# Altium PCB PCB1.PcbDoc
Units mm, origin at the board's own origin, x right, y up, seen from the top; angles counter-clockwise.
Board outline 152.4 x 101.6 mm, 2 copper layers (Top Layer, Bottom Layer); 36 components, 22 nets, 142 pads, 32 vias.
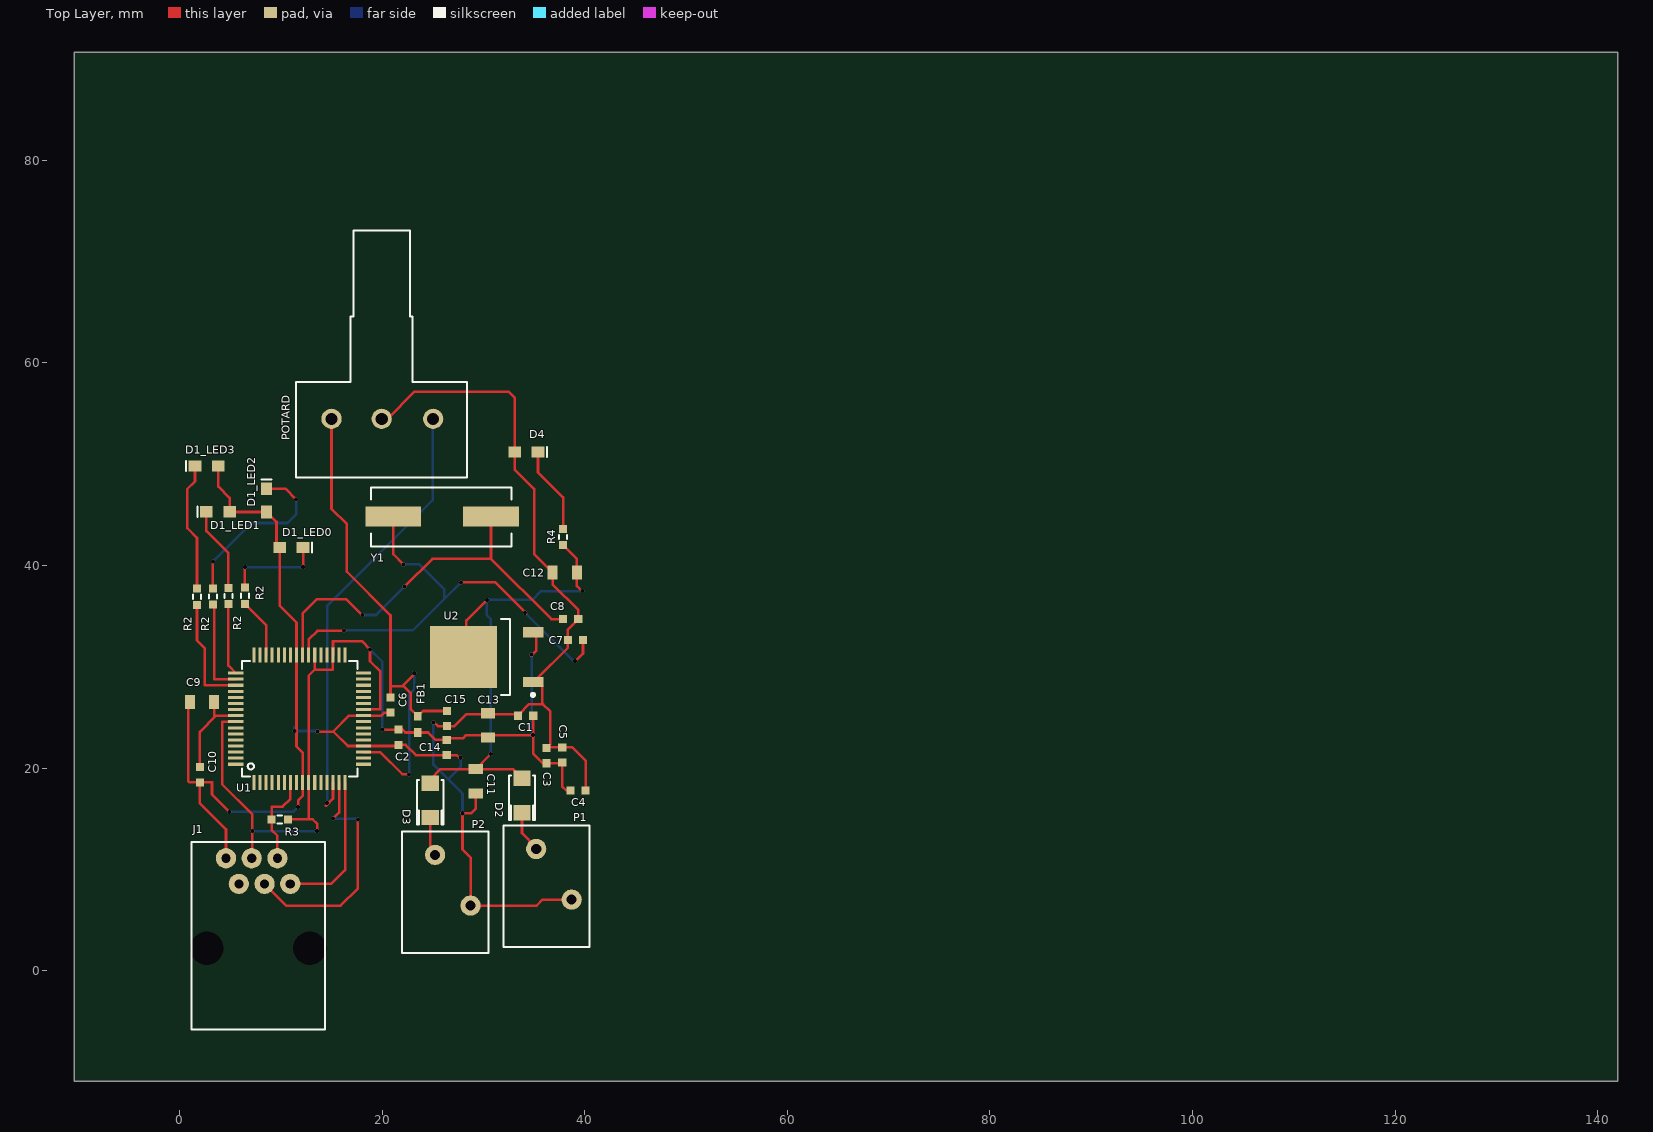
[diagram p0: Top Layer view]
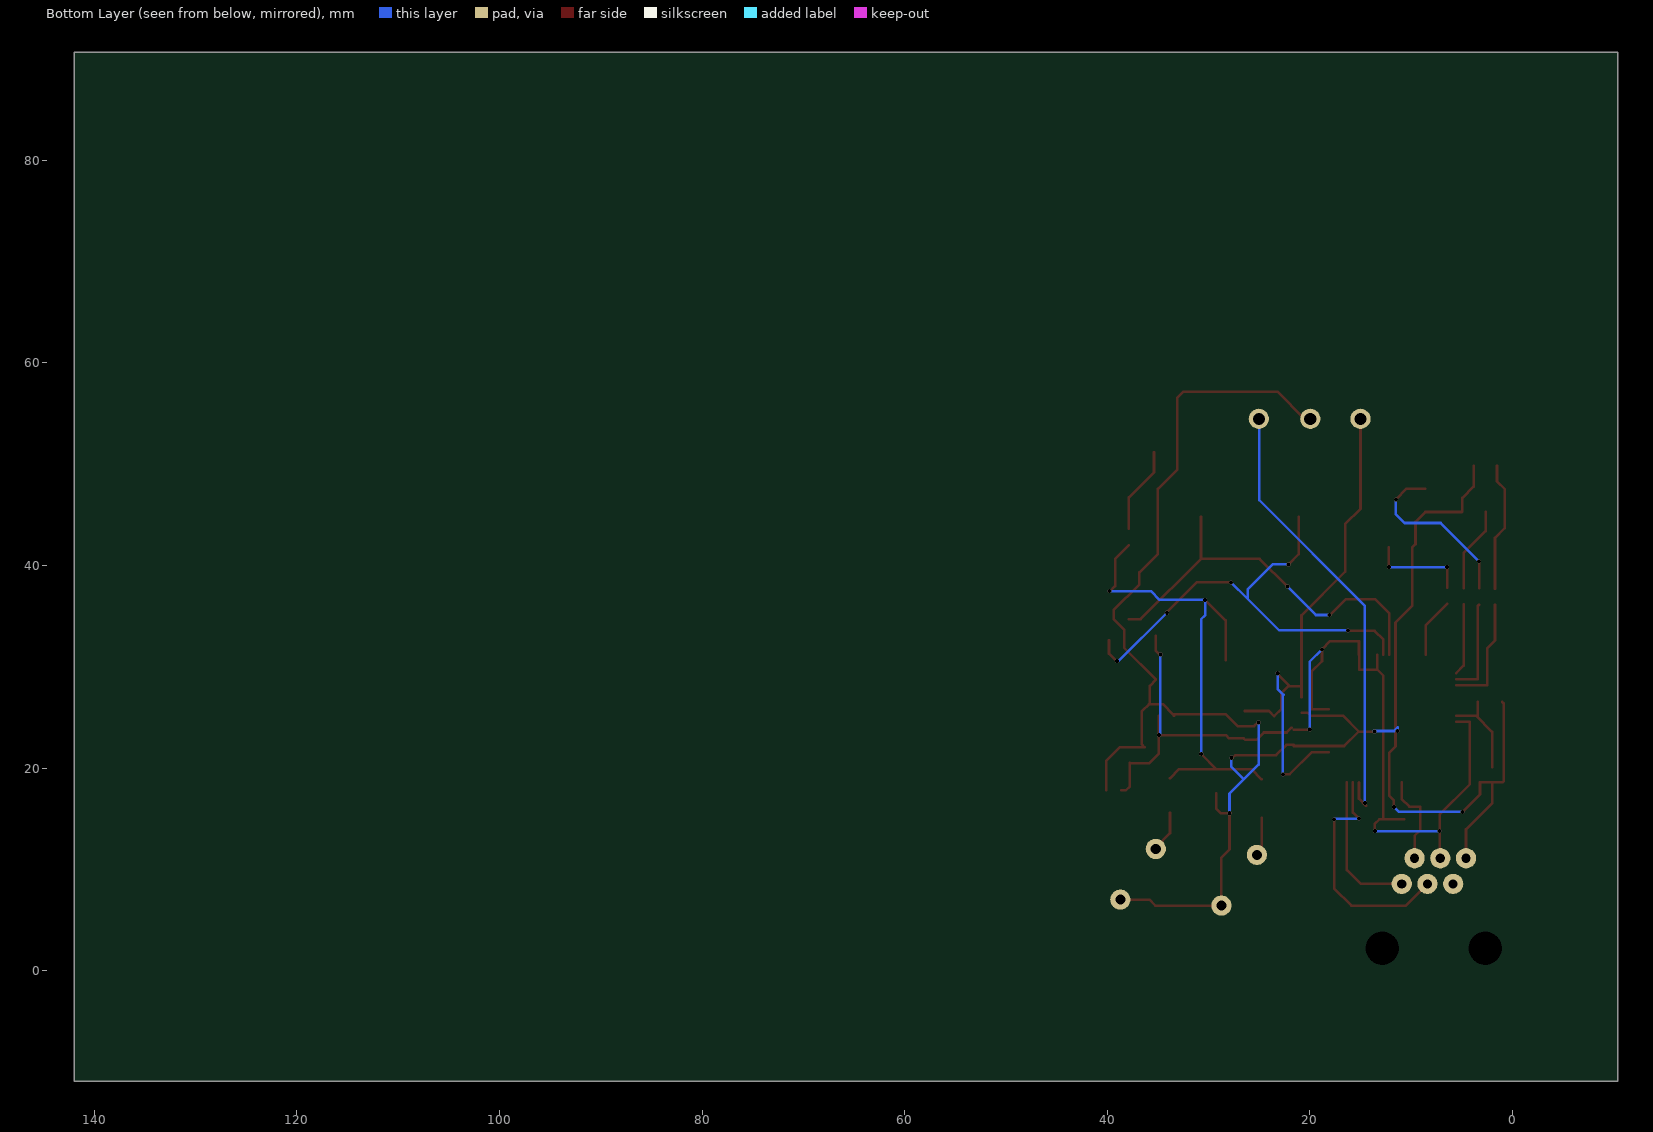
[diagram p1: Bottom Layer view, seen from below]

## Layer stack, top to bottom
Top Solder: solder mask 0.0102, Solder Resist, Dk 3.5
Top Layer: signal copper 0.0356
Dielectric 1: dielectric 0.32, FR-4, Dk 4.8
Bottom Layer: signal copper 0.0356
Bottom Solder: solder mask 0.0102, Solder Resist, Dk 3.5

## Board outline
-10.414,-10.922 141.986,-10.922 141.986,90.678 -10.414,90.678

## Design rules (kind name [scope] priority, off if disabled: settings)
Clearance [All] p1: gap=0.254
PolygonConnect [All] p1: connectstyle=Relief reliefconductorwidth=0.254 reliefentries=4 polygonreliefangle="90 Angle" airgapwidth=0.254
RoutingVias [All] p1: holewidth=0.711 width=1.27 viastyle="Through Hole" minholewidth=0.711 minwidth=1.27 maxholewidth=0.711 maxwidth=1.27
SolderMaskExpansion [All] p1: expansion=0.102
UnpouredPolygon [All] p1: allowunpoured=FALSE
Width [All] p1: maxlimit=0.254 minlimit=0.254 preferedwidth=0.254
29 further rules are at their usual default settings.

## Classes and differential pairs
channel class P4: LED0 LED1 LED2 LED3
net class LED[0..3]: LED0 LED1 LED2 LED3
component class POWER: C11 C12 C13 C14 C15 D2 D3 D4 FB1 R4 U2
component class PIC: C1 C2 C3 C4 C5 C6 C7 C8 C9 C10 J1 R3 U1 Y1
component class P1: POTARD
component class LED3: D1_LED3 R2
component class LED2: D1_LED2 R2
component class LED1: D1_LED1 R2
component class LED0: D1_LED0 R2

## Components (designator, comment, footprint, x,y, rotation, side; value= is the part's Value field where it differs from the comment)
C1 "100n" CAPC1608N 32.565,24.961 r0 top
C2 "100n" CAPC1608N 21.795,21.459 r90 top
C3 "100n" CAPC1608N 36.019,22.817 r270 top
C4 "100n" CAPC1608N 40.919,18.002 r180 top
C5 "100n" CAPC1608N 37.561,22.881 r270 top
C6 "100n" CAPC1608N 21.001,24.631 r90 top
C7 "20p" CAPC1608N 40.654,32.832 r180 top
C8 "20p" CAPC1608N 37.014,34.499 r0 top
C9 "6.3V" CAPC2012N 3.199,27.129 r180 top
C10 "6.3V" CAPC1608N 1.789,20.926 r270 top
C11 "6.3V" CAPC2012N 29.831,17.697 r90 top
C12 "6.3V" CAPC2012N 37.014,38.717 r0 top
C13 "6.3V" CAPC2012N 29.828,25.216 r270 top
C14 "6.3V" CAPC1608N 26.567,20.441 r90 top
C15 "6.3V" CAPC1608N 26.601,23.298 r90 top
D1_LED0 "Green LED" "LED 0805N" 11.026,41.779 r180 top (schematic designator D1)
D1_LED1 "Green LED" "LED 0805N" 3.781,45.316 r0 top (schematic designator D1)
D1_LED2 "Green LED" "LED 0805N" 8.577,46.439 r270 top (schematic designator D1)
D1_LED3 "Green LED" "LED 0805N" 2.658,49.84 r0 top (schematic designator D1)
D2 "GF1A" "GF1A Diode" 33.792,17.288 r90 top
D3 "GF1A" "GF1A Diode" 24.74,16.81 r90 top
D4 "Green LED" "LED 0805N" 34.225,51.201 r180 top
FB1 "Inductor" INDC1608AN 23.503,24.316 r90 top
J1 "Program / Debug" RJ12_90 1.143,12.7 r270 top
P1 "12V Main" PHOENIX_1985195 31.945,2.313 r0 top
P2 "12V Battery" PHOENIX_1985195 21.963,1.726 r0 top
POTARD "RPot" POTARD 19.939,54.483 r0 top (schematic designator R1)
R2 "Res1" RESC1608N 1.706,36.914 r270 top
R2 "Res1" RESC1608N 3.27,36.948 r270 top
R2 "Res1" RESC1608N 4.801,36.982 r270 top
R2 "Res1" RESC1608N 6.434,37.016 r270 top
R3 "Res1" RESC1608N 9.869,14.94 r0 top
R4 "Res1" RESC1608N 37.857,42.819 r270 top
U1 "PIC32MX764F128H-I/PT" QFP50P1200X1200X120-64 6.128,19.179 r90 top
U2 "AP1117" TD03B_N 28.03,30.967 r90 top
Y1 "8MHz" "HC49/4H SMX CRYSTAL" 25.908,44.831 r180 top

## Footprints (in the part's own frame and the unit in brackets; to place one, negate y for a bottom-side part, rotate by r counter-clockwise, add the part's x,y. Pads: shape width x height; smd on the part's side, far side on the other; paste and mask are expansions set on the pad)
CAPC1608N [mm]
  rect 0.8x0.8 smd: 1(0.838,0.203) 2(2.337,0.203)
CAPC2012N [mm]
  rect 1x1.4 smd: 1(-0.2,0.6) 2(2.2,0.6)
"GF1A Diode" [mm]
  rect 1.5x1.7 smd: 1(-1.7,0) 2(1.7,0)
  silkscreen extent -2.4,-1.3 2,1.3
"HC49/4H SMX CRYSTAL" [mm]
  rect 5.5x2 smd: 1(-4.826,0) 2(4.826,0)
  silkscreen extent -6.86,-2.86 7.04,2.94
INDC1608AN [mm]
  rect 0.85x0.7 smd: 1(-0.8,0) 2(0.8,0)
"LED 0805N" [mm]
  rect 1.25x1.1 smd: 1(-1.15,0) 2(1.15,0)
  silkscreen extent -2.05,-0.5 -2.05,0.5
PHOENIX_1985195 [mm]
  round 2 hole 1: 1(3.25,9.7) 2(6.75,4.7)
  silkscreen extent 0,0 8.5,12
POTARD [mm]
  round 2 hole 1.2: 1(-4.953,0) 2(0,0) 3(5.08,0)
  silkscreen extent -8.45,-5.8 8.45,18.62
QFP50P1200X1200X120-64 [mm]
  rect 1.5x0.3 smd mask+0.102: 1(-0.6,-1.2) 2(-0.6,-1.8) 3(-0.6,-2.4) 4(-0.6,-3) 5(-0.6,-3.6) 6(-0.6,-4.2) 7(-0.6,-4.8) 8(-0.6,-5.4) 9(-0.6,-6) 10(-0.6,-6.6) 11(-0.6,-7.2) 12(-0.6,-7.8) 13(-0.6,-8.4) 14(-0.6,-9) 15(-0.6,-9.6) 16(-0.6,-10.2) 33(12,-10.2) 34(12,-9.6) 35(12,-9) 36(12,-8.4) 37(12,-7.8) 38(12,-7.2) 39(12,-6.6) 40(12,-6) 41(12,-5.4) 42(12,-4.8) 43(12,-4.2) 44(12,-3.6) 45(12,-3) 46(12,-2.4) 47(12,-1.8) 48(12,-1.2)
  rect 0.3x1.5 smd mask+0.102: 17(1.2,-12) 18(1.8,-12) 19(2.4,-12) 20(3,-12) 21(3.6,-12) 22(4.2,-12) 23(4.8,-12) 24(5.4,-12) 25(6,-12) 26(6.6,-12) 27(7.2,-12) 28(7.8,-12) 29(8.4,-12) 30(9,-12) 31(9.6,-12) 32(10.2,-12) 49(10.2,0.6) 50(9.6,0.6) 51(9,0.6) 52(8.4,0.6) 53(7.8,0.6) 54(7.2,0.6) 55(6.6,0.6) 56(6,0.6) 57(5.4,0.6) 58(4.8,0.6) 59(4.2,0.6) 60(3.6,0.6) 61(3,0.6) 62(2.4,0.6) 63(1.8,0.6) 64(1.2,0.6)
  silkscreen extent 0,-11.4 11.4,0
RESC1608N [mm]
  rect 0.8x0.8 smd: 1(-0.8,0) 2(0.8,0)
  silkscreen extent -0.2,-0.4 0.2,0.4
RJ12_90 [mm]
  round 2 hole 0.9 mask+0.102: 1(1.6,8.5) 2(1.6,5.96) 3(1.6,3.42) 4(4.14,9.77) 5(4.14,7.23) 6(4.14,4.69)
  round 0 hole 3.3: 7(10.5,11.68) 7(10.5,1.52)
  silkscreen extent 0,0 18.5,13.2
TD03B_N [mm]
  rect 1x2 smd mask+0.102: 1(-2.45,-6.886) 4(2.45,-6.886)
  rect 6.1x6.6 smd mask+0.102: 3(0,0)
  silkscreen extent -3.88,-7 3.75,-3.68

## Part data
C1 C2 C3 C4 C5 C6 C7 C8 C9 C10 C11 C12 C13 C14 C15: library part Cap, "Capacitor"
D1_LED0 D1_LED1 D1_LED2 D1_LED3 D4: library part LED0, "Typical INFRARED GaAs LED"
D2 D3: library part Diode, "Default Diode"
J1: library part Component_1
P1 P2: library part "Header 2H", "Header, 2-Pin, Right Angle"
POTARD: "Potentiometer"
R2 R2 R2 R2 R3 R4: "Resistor"
U1: library part "PIC 32"
Y1: library part XTAL, "Crystal Oscillator"

## Via types
v1: diameter 0.4, hole 0.4, Top Layer to Bottom Layer, 32 vias

## Nets (pads, with @x,y where several pads share a name; then routed paths per layer and width w, separated by ;. In a path a pad name is that pad's centre, name@x,y a point inside that pad or via, vN(x,y) a via of type N, cw(c..) or ccw(c..) an arc to the next point about the centre after c; other vN are vias at no path point)
ALIM: D2.1 P1.1 | length 4
  Top Layer w0.254: D2.1 33.792,13.578 P1.1@35.195,12.175
BATTERY: D3.1 P2.1 | length 3.9
  Top Layer w0.254: D3.1 24.74,11.899 P2.1
GND: C1.1 C2.1 C3.1 C4.1 C5.1 C6.1 C7.2 C8.2 C9.2 C10.2 C11.1 C12.1 C13.1 C14.1 C15.1 D1_LED0.2 D1_LED1.2 D1_LED2.2 D1_LED3.2 D4.2 J1.3 P1.2 P2.2 POTARD.2 U1.9 U1.20 U1.25 U1.41 U2.1 | length 202.2
  Top Layer w0.254: C9.2 0.855,26.384 0.855,18.686 0.951,18.59 C10.2 ; D1_LED3.2 3.808,47.798 4.931,46.676 D1_LED1.2 ; J1.3 4.563,13.948 1.992,16.518 C10.2 ; v1(4.91,15.678) 3.185,17.403 3.185,18.59 C10.2 ; D1_LED1.2@4.958,45.289 D1_LED2.2 9.551,44.315 9.551,42.104 D1_LED0.2 9.876,36.022 11.528,34.37 U1.41 11.528,22.131 12.128,21.531 U1.9 12.128,17.258 11.683,16.813 v1(11.683,16.167) ; v1@13.694,23.578 15.207,23.578 ; POTARD.2 20.497,54.483 23.194,57.179 32.471,57.179 33.075,56.575 D4.2 33.075,49.48 34.986,47.569 34.986,41.146 C12.1 36.814,38.13 39.351,35.593 C8.2 38.317,33.668 C7.2 38.317,31.88 35.19,28.753 35.789,28.119 35.789,26.395 36.598,25.587 36.598,22.355 36.286,22.042 C5.1 38.765,22.042 40.081,20.726 C4.1 ; C6.1 20.194,25.469 19.903,25.179 U1.25 16.729,25.179 15.207,23.657 15.207,23.578 ; C2.1@21.431,22.136 C2.1 22.289,22.297 23.307,21.279 C14.1 27.338,21.279 27.596,21.021 v1(27.73,21.021) ; C2.1@21.592,22.179 U1.20 16.606,22.179 15.207,23.578 ; v1@25.077,24.541 25.482,24.136 C15.1 27.118,24.136 28.282,25.3 33.478,25.3 34.49,26.312 35.872,26.312 ; v1@27.811,15.556 28.789,15.556 29.231,15.998 C11.1 ; v1(27.916,15.538) 27.916,11.962 28.713,11.165 P2.2 35.251,6.426 35.838,7.013 P1.2 ; C1.1@33.39,25.15 C1.1
  Bottom Layer w0.254: v1(4.91,15.678) 11.194,15.678 v1(11.683,16.167) ; v1(11.312,23.657) 11.312,24.016 11.667,23.662 v1@13.673,23.662 ; v1(25.049,24.513) 25.049,20.343 27.916,17.476 v1(27.916,15.538) ; 26.528,18.916 27.73,20.118 v1(27.73,21.021)
  other v1: 13.609,23.599
LED0: R2.2@6.434,36.216 U1.46 | length 5.9
  Top Layer w0.254: R2.2@6.434,36.216 8.528,34.122 U1.46
LED1: R2.2@4.801,36.182 U1.49 | length 7.1
  Top Layer w0.254: R2.2@4.801,36.182 4.801,30.106 U1.49
LED2: R2.2@3.27,36.148 U1.50 | length 9.6
  Top Layer w0.254: R2.2@3.27,36.148 3.399,36.019 3.399,28.779 U1.50
LED3: R2.2@1.706,36.114 U1.51 | length 11.3
  Top Layer w0.254: R2.2@1.706,36.114 1.706,32.602 2.486,31.822 2.486,28.179 U1.51
MCLR: J1.1 R3.1 U1.7 | length 9.1
  Top Layer w0.254: J1.1 9.643,13.319 9.069,13.892 R3.1 9.069,16.154 9.099,16.184 10.164,16.184 10.928,16.948 U1.7
NetC9_1: C9.1 C10.1 U1.56 | length 9.2
  Top Layer w0.254: C10.1 1.992,23.583 3.588,25.179 U1.56 ; 3.399,25.044 C9.1
NetD1_LED0_1: D1_LED0.1 R2.1@6.434,37.816 | length 9.7
  Top Layer w0.254: R2.1@6.434,37.816 v1(6.434,39.842) ; v1(12.176,39.841) D1_LED0.1
  Bottom Layer w0.254: v1(6.434,39.842) v1(12.176,39.841)
NetD1_LED1_1: D1_LED1.1 R2.1@4.801,37.782 | length 8.4
  Top Layer w0.254: D1_LED1.1 2.631,43.407 4.801,41.237 R2.1@4.801,37.782
NetD1_LED2_1: D1_LED2.1 R2.1@3.27,37.748 | length 17.6
  Top Layer w0.254: R2.1@3.27,37.748 v1(3.27,40.396) ; D1_LED2.1 10.441,47.589 v1(11.49,46.539)
  Bottom Layer w0.254: v1(3.27,40.396) 7.074,44.2 10.635,44.2 11.49,45.055 v1(11.49,46.539)
NetD1_LED3_1: D1_LED3.1 R2.1@1.706,37.714 | length 12.8
  Top Layer w0.254: D1_LED3.1 1.508,48.305 0.738,47.534 0.738,43.694 1.706,42.727 R2.1@1.706,37.714
NetD4_1: D4.1 R4.1 | length 8.6
  Top Layer w0.254: D4.1 35.375,49.204 37.857,46.722 R4.1
NetR1_3: POTARD.3 U1.14 | length 45
  Top Layer w0.254: 14.423,16.271 15.128,16.976 U1.14
  Bottom Layer w0.254: v1(14.545,16.551) 14.545,36.021 24.982,46.458 POTARD.3@24.982,54.661
PGC: J1.5 U1.15 | length 23.8
  Top Layer w0.254: J1.5 10.506,6.427 15.89,6.427 17.583,8.12 v1(17.583,14.927) ; v1(15.139,15.001) 15.728,15.591 U1.15
  Bottom Layer w0.254: v1(15.139,15.001) v1@17.509,15.001
PGD: J1.4 U1.16 | length 14.6
  Top Layer w0.254: J1.4 14.95,8.56 16.328,9.938 U1.16
V3P3: C1.2 C2.2 C3.2 C4.2 C5.2 C13.2 C14.2 FB1.1 J1.2 R3.2 U1.10 U1.26 U1.35 U1.38 U1.57 U2.4 | length 103.8
  Top Layer w0.254: U1.57 4.21,24.579 4.194,24.563 4.194,18.384 7.162,15.416 v1(7.162,13.775) J1.2@7.162,11.159 ; R3.2 11.765,14.94 11.77,14.945 13.131,14.945 13.568,14.509 v1(13.568,13.775) ; 12.728,14.961 U1.10 12.728,29.117 13.328,29.717 ; U1.38 13.328,29.717 ; U1.35@15.123,31.174 15.123,29.717 13.328,29.717 ; U1.35 15.128,32.531 17.984,32.531 v1(18.784,31.73) 18.784,30.548 19.801,29.53 19.801,25.795 U1.26@18.144,25.795 ; v1(19.995,23.796) C2.2 ; C2.2@21.796,23.999 22.279,23.516 FB1.1 24.528,23.516 25.267,22.777 C14.2 26.525,22.939 27.973,22.939 28.285,23.251 v1(34.89,23.251) 34.89,21.419 35.828,20.481 C3.2 C5.2@37.701,20.481 ; v1@34.697,31.071 35.19,31.564 U2.4@35.19,33.079 ; v1@34.902,23.058 C1.2 ; C5.2 37.764,18.196 38.162,17.799 C4.2
  Bottom Layer w0.254: v1(7.162,13.775) v1(13.568,13.775) ; v1(18.784,31.73) 19.995,30.519 v1(19.995,23.796) ; v1(34.748,31.224) 34.748,23.394 v1(34.89,23.251)
V3P3A: C6.2 C15.2 FB1.2 POTARD.1 U1.19 | length 55.3
  Top Layer w0.254: POTARD.1 14.986,45.596 16.503,44.079 16.503,39.384 20.812,35.075 20.812,28.097 ; U1.19 19.79,21.579 21.969,19.4 v1@22.713,19.4 ; C6.2@20.812,26.982 20.812,28.097 ; 22.05,28.165 22.797,27.418 22.797,25.822 FB1.2 24.021,25.635 C15.2 ; v1@23.178,29.302 21.973,28.097 20.812,28.097
  Bottom Layer w0.254: v1(22.647,19.351) 22.647,27.174 22.586,27.236 23.156,27.806 v1(23.156,29.365)
V5: C11.2 C12.2 D2.2 D3.2 R4.2 U2.3 | length 49.4
  Top Layer w0.254: D3.2@24.74,18.879 25.757,19.897 C11.2 ; U2.3@28.304,30.629 28.304,34.586 v1(30.325,36.607) ; v1(30.709,21.375) C11.2 ; D2.2 32.883,19.897 C11.2 ; R4.2 39.214,40.662 C12.2 39.214,37.964 v1@39.768,37.41
  Bottom Layer w0.254: v1(30.709,21.375) 30.709,34.704 30.325,35.088 v1(30.325,36.607) 34.81,36.607 35.683,37.48 v1(39.786,37.48)
X1: C7.1 U1.39 Y1.2 | length 47
  Top Layer w0.254: U1.39 12.728,32.691 13.592,33.555 v1@16.322,33.555 ; Y1.2 21.082,41.132 v1(22.097,40.117) ; v1(27.771,38.329) 31.169,38.329 v1@34.185,35.313 ; v1@39.067,30.56 39.816,31.308 C7.1
  Bottom Layer w0.254: v1(16.239,33.591) 23.007,33.591 26.135,36.719 ; v1@22.097,40.143 23.605,40.143 26.135,37.613 26.135,36.719 ; v1@27.758,38.342 26.135,36.719 ; v1(34.109,35.339) 38.862,30.585 v1(39.041,30.585)
X2: C8.1 U1.40 Y1.1 | length 39.9
  Top Layer w0.254: U1.40 12.128,35.262 13.544,36.678 16.394,36.678 v1@17.98,35.093 ; v1(22.191,37.916) 24.941,40.667 30.734,40.667 ; Y1.1 30.734,40.667 ; C8.1 36.698,34.702 30.734,40.667
  Bottom Layer w0.254: v1(18.051,35.117) 19.391,35.117 v1(22.191,37.916)
pads on no net: J1.6 J1.7 U1.1 U1.2 U1.3 U1.4 U1.5 U1.6 U1.8 U1.11 U1.12 U1.13 U1.17 U1.18 U1.21 U1.22 U1.23 U1.24 U1.27 U1.28 U1.29 U1.30 U1.31 U1.32 U1.33 U1.34 U1.36 U1.37 U1.42 U1.43 U1.44 U1.45 U1.47 U1.48 U1.52 U1.53 U1.54 U1.55 U1.58 U1.59 U1.60 U1.61 U1.62 U1.63 U1.64

## Silkscreen, mask and mechanical layers (free items; w line width, h text height)
Mechanical 1:
  lines w0.2: 0,0 0,58.5 41,58.5 41,0 0,0